# Altium PCB g431.PcbDoc
Units mil, origin at the board's own origin, x right, y up, seen from the top; angles counter-clockwise.
Board outline 2340 x 3365 mil, 4 copper layers (Top Layer, GND, PWR, Bottom Layer), stack 62.449 mil thick; 52 components, 61 nets, 258 pads, 62 vias.
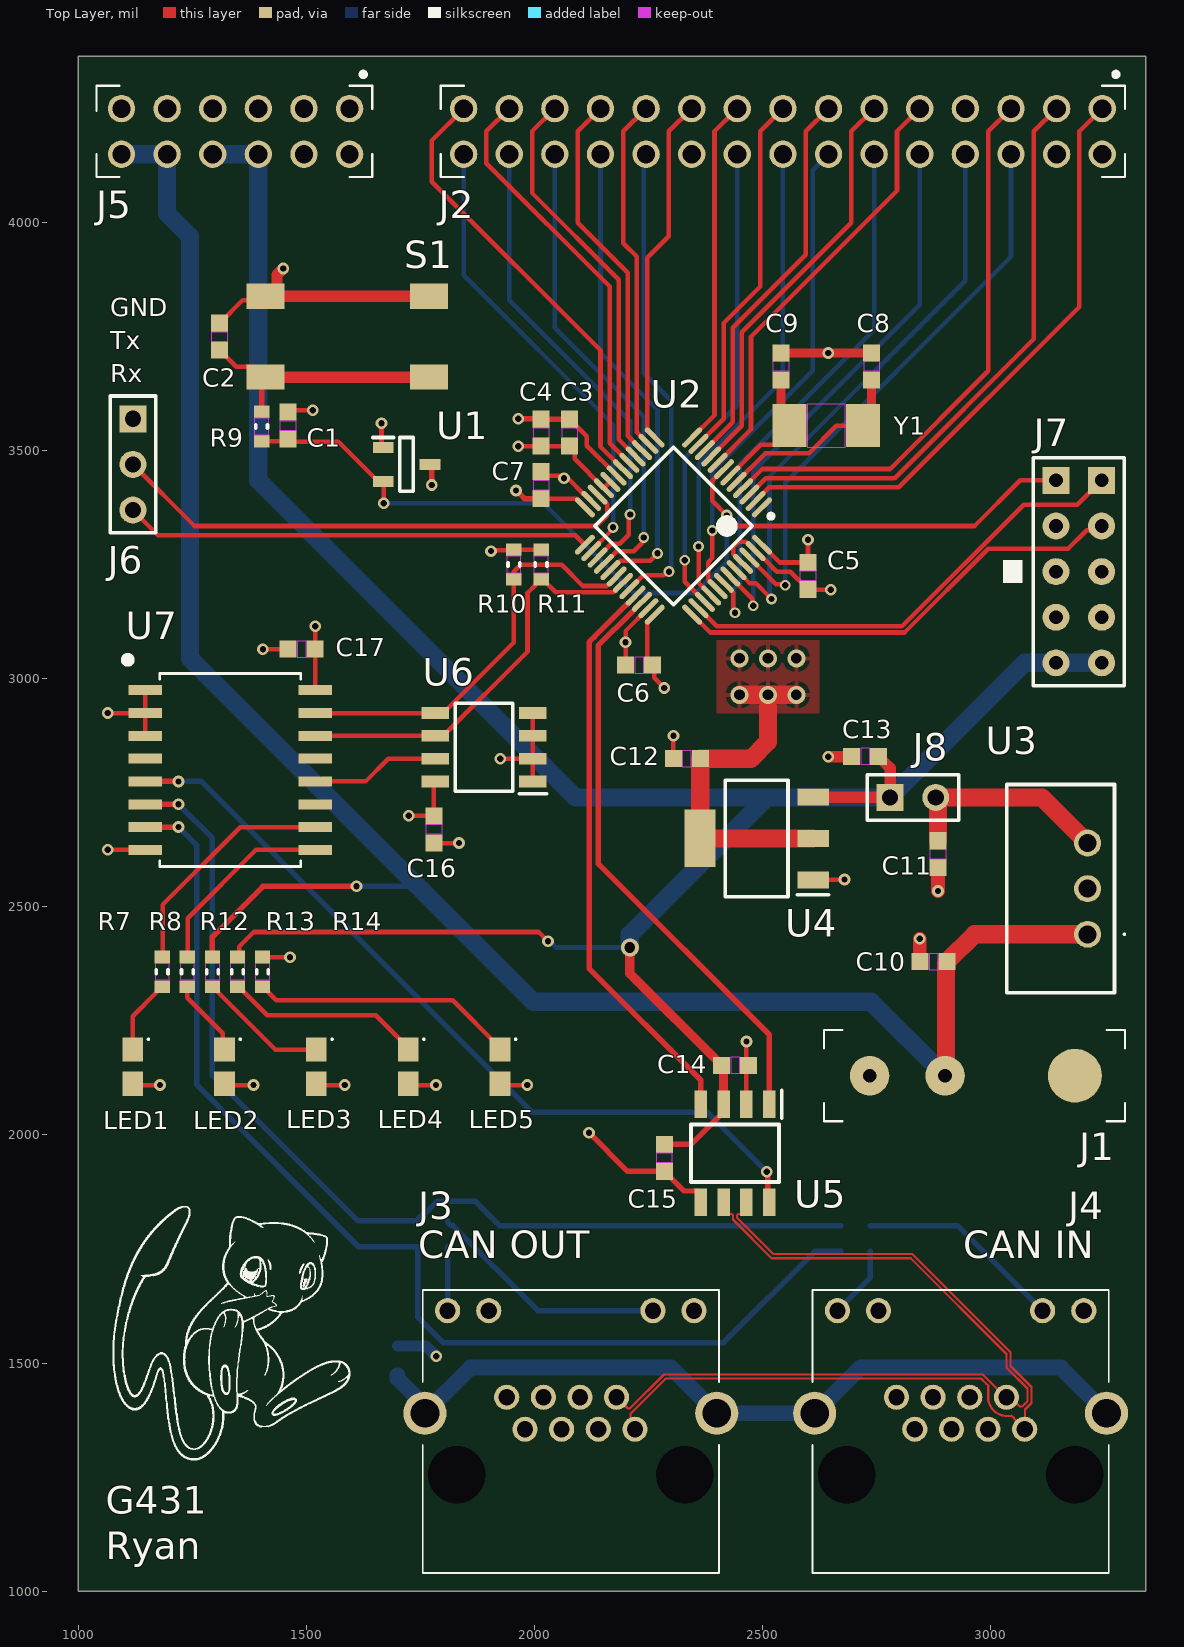
[diagram p0: Top Layer view]
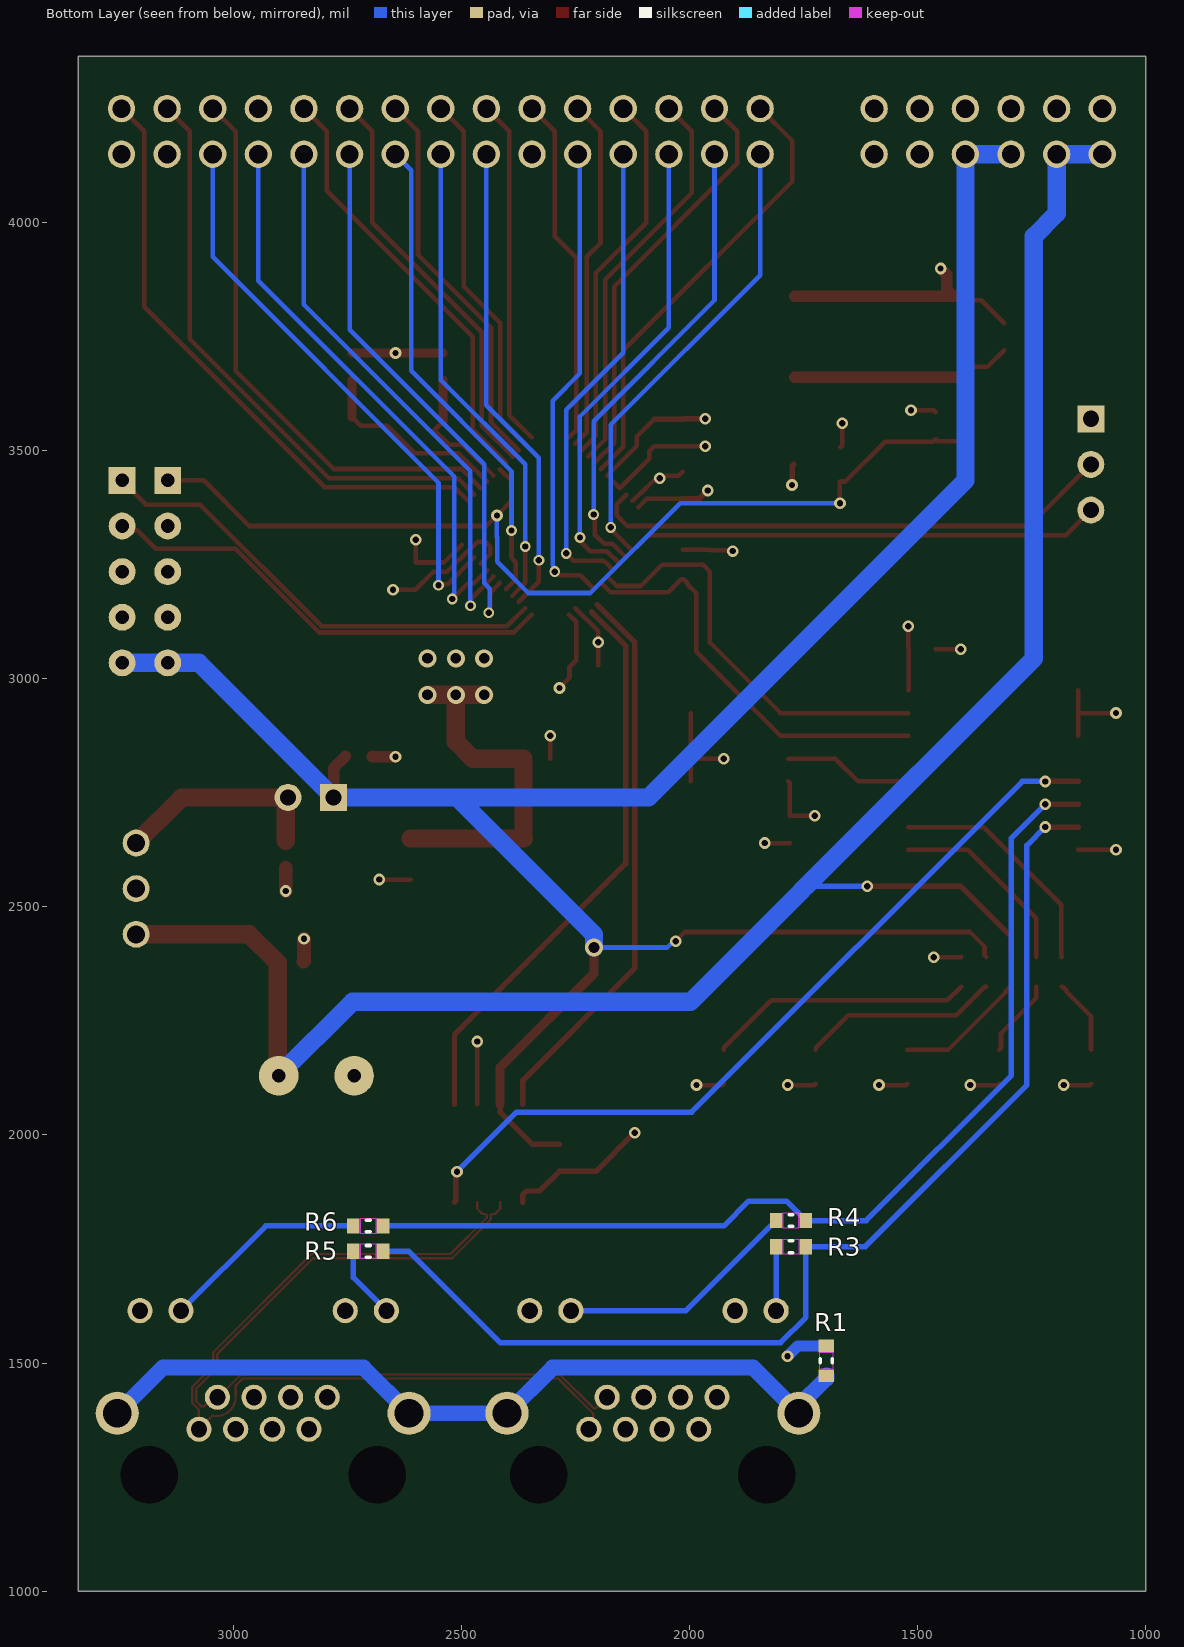
[diagram p1: Bottom Layer view, seen from below]
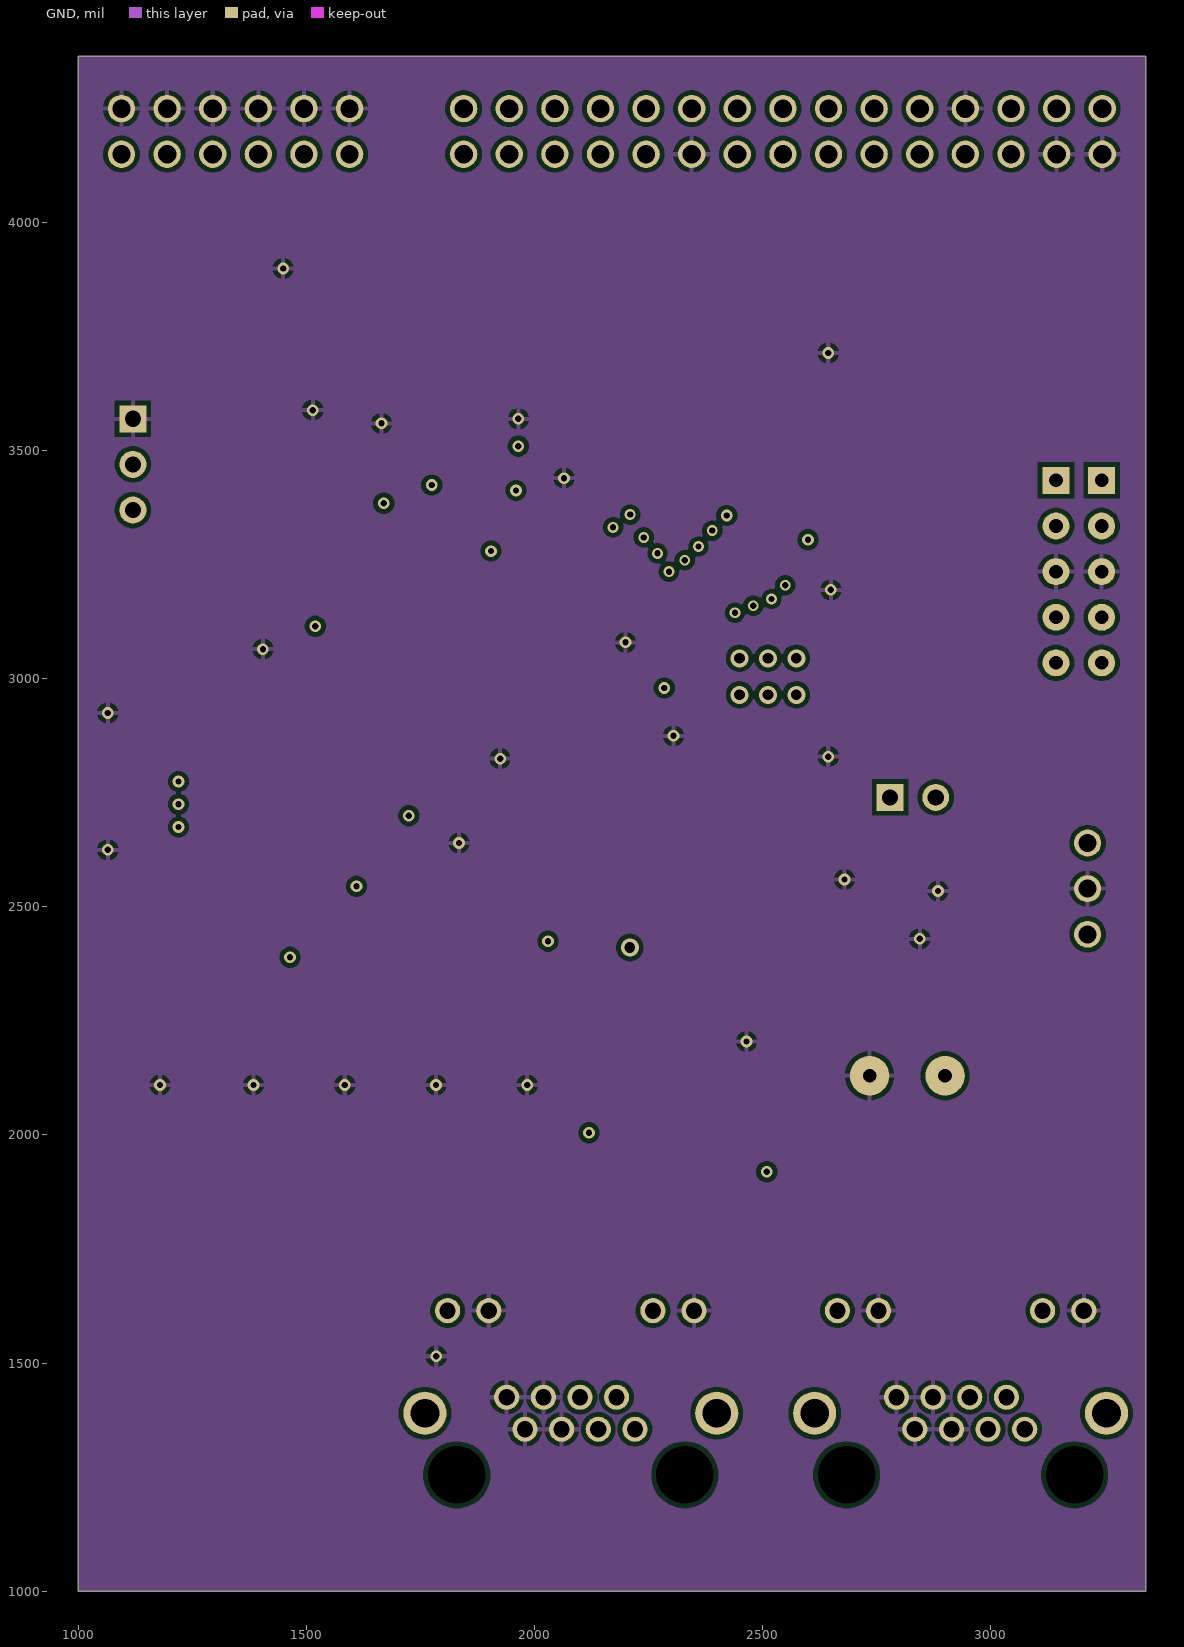
[diagram p2: GND]
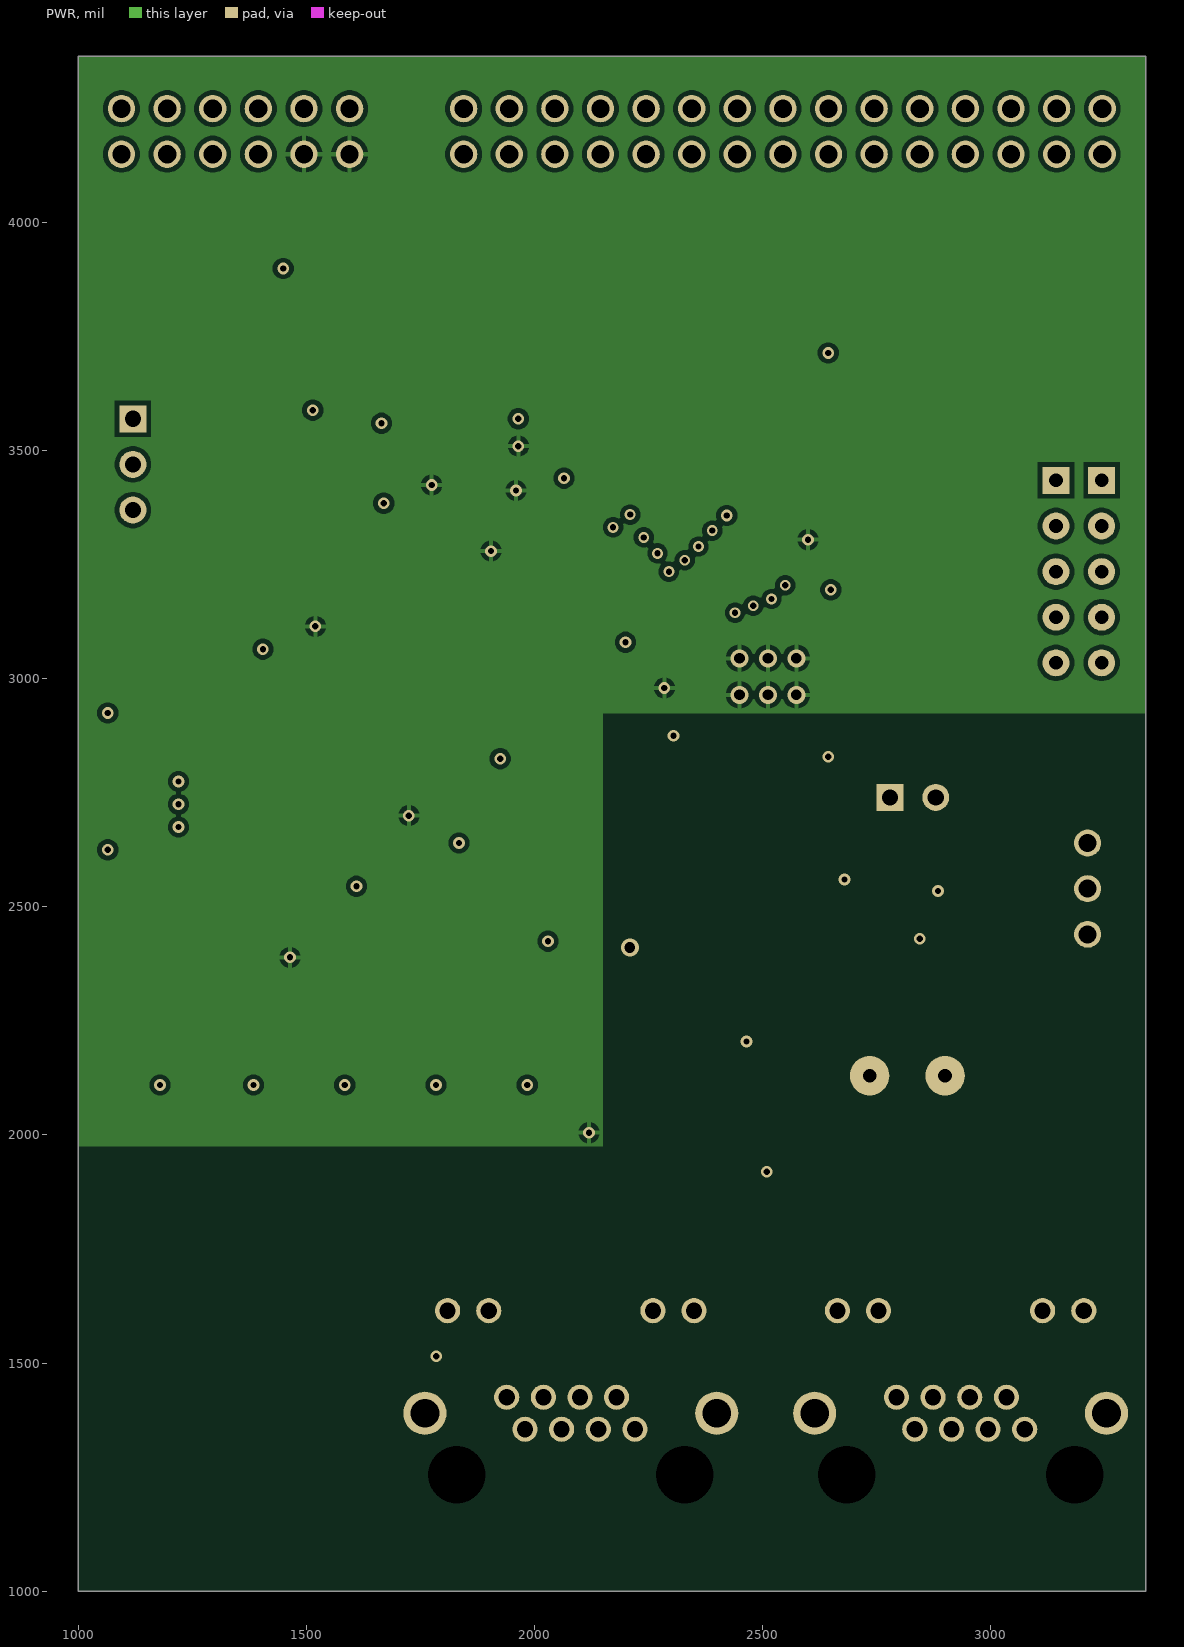
[diagram p3: PWR]
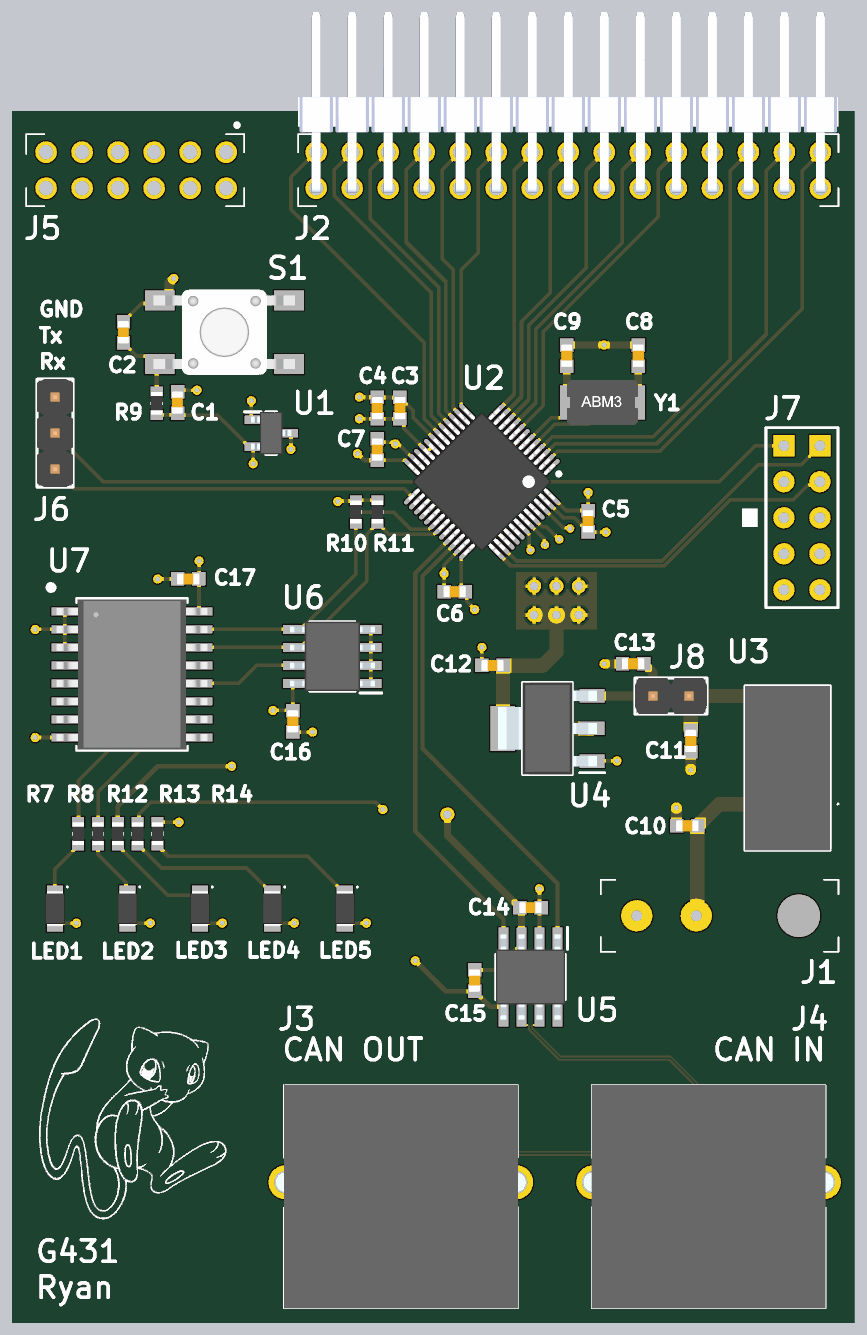
[diagram p4: 3D render of the assembled board from above, using the file's embedded part models]
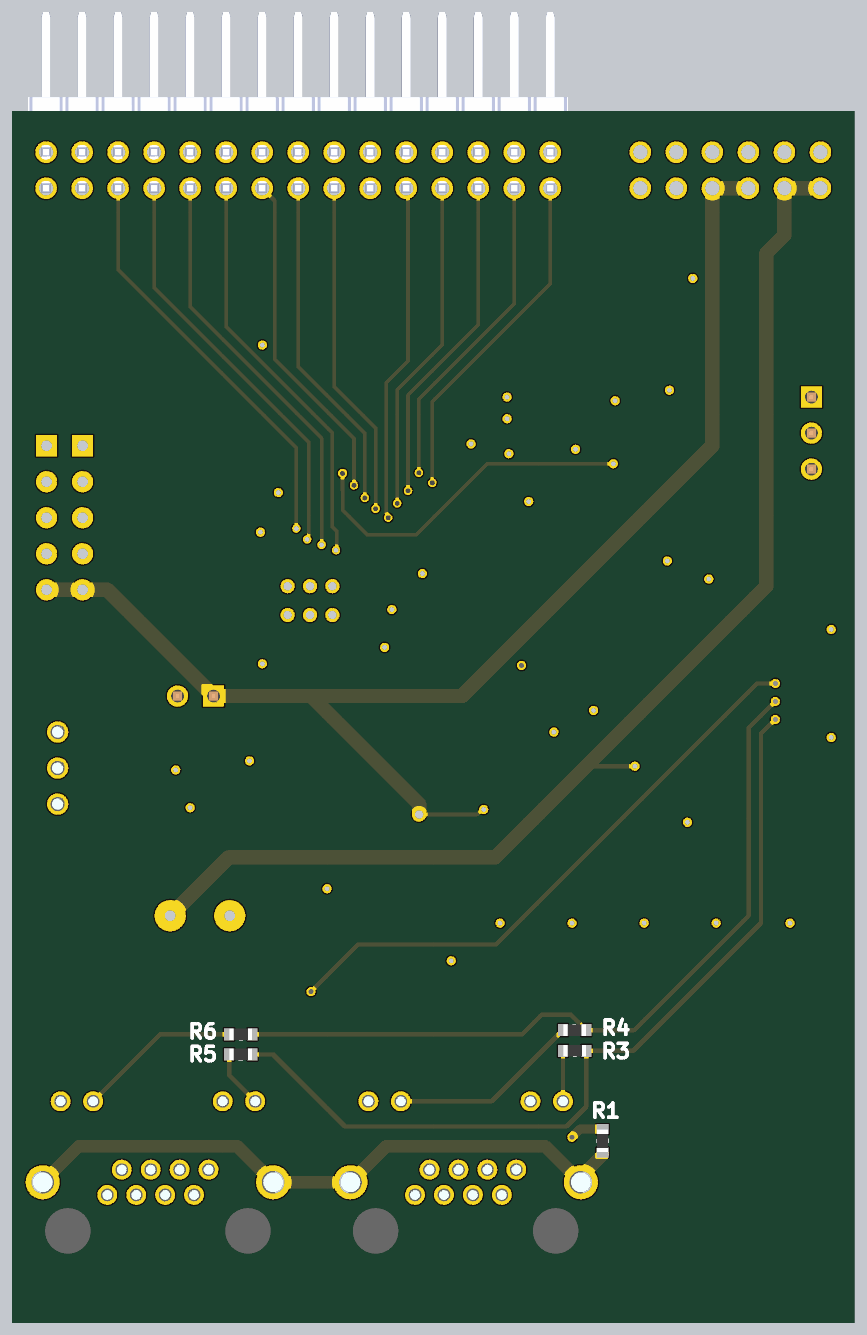
[diagram p5: 3D render of the assembled board from below, using the file's embedded part models]

## Layer stack, top to bottom
Top Solder: solder mask 0.4, Solder Resist, Dk 3.8
Top Layer: signal copper 1.378
Dielectric 2: prepreg 8.284, PP-006, Dk 4.6
GND: signal copper 0.598
Dielectric 1: dielectric 41.929, FR-4, Dk 4.6
PWR: signal copper 0.598
Dielectric 3: prepreg 8.284, PP-006, Dk 4.6
Bottom Layer: signal copper 1.378
Bottom Solder: solder mask 0.4, Solder Resist, Dk 3.8

## Board outline
1000,1000 3340,1000 3340,4365 1000,4365

## Design rules (kind name [scope] priority, off if disabled: settings)
Clearance [All] p1: gap=10 ignorepadtopadclearanceinfootprint=TRUE except(0: Arc-Hole Track-Hole SMDPad-Hole THPad-Hole Via-Hole Fill-Hole Poly-Hole Region-Hole Text-Hole; 3.5: Arc-Arc Arc-Track Track-Track; 5: SMDPad-SMDPad SMDPad-THPad; 7.87: Arc-SMDPad Track-SMDPad SMDPad-Fill SMDPad-Poly SMDPad-Region; 19.68: THPad-THPad)
DiffPairsRouting DiffPairsRouting_CAN [InDifferentialPairClass('CAN')] p1: maxlimit=5 minlimit=4 mostfreqgap=5 toplayer_maxgap=4 toplayer_prefgap=4 toplayer_minwidth=5 toplayer_maxwidth=5 toplayer_prefwidth=5 bottomlayer_maxgap=4 bottomlayer_prefgap=4 bottomlayer_minwidth=5 bottomlayer_maxwidth=5 bottomlayer_prefwidth=5 impedanceprofiledriven=TRUE impedanceprofileid={B7318D11-DDFB-4322-9E92-17B5BC57862B} impedanceprofilevalue=100.000000 maxuncoupledlength=500
DiffPairsRouting [All] p2 off: maxlimit=10 minlimit=10 mostfreqgap=10 toplayer_minwidth=3.5 toplayer_maxwidth=15 toplayer_prefwidth=15 midlayer1_minwidth=15 midlayer1_maxwidth=15 midlayer1_prefwidth=15 midlayer2_minwidth=15 midlayer2_maxwidth=15 midlayer2_prefwidth=15 bottomlayer_minwidth=3.5 bottomlayer_maxwidth=15 bottomlayer_prefwidth=15 maxuncoupledlength=500
HoleSize [All] p1: absolutevalues=TRUE maxlimit=99999 minlimit=1 maxpercent=80.000 minpercent=20.000
PolygonConnect [All] p1: connectstyle=Relief reliefconductorwidth=10 reliefentries=4 polygonreliefangle="90 Angle" airgapwidth=10
RoutingVias [All] p1: holewidth=19.68 width=39.37 viastyle="Through Hole" minholewidth=7.87 minwidth=23.62 maxholewidth=28 maxwidth=50
SilkToSolderMaskClearance [IsPad] p1: minsilkscreentomaskgap=5.91 clearancetoexposedcopper=TRUE
SolderMaskExpansion [All] p1: expansion=4 istentingtop=FALSE
Width [All] p1 off: maxlimit=100 minlimit=3.5 preferedwidth=10
27 further rules are at their usual default settings.

## Classes and differential pairs
differential pair class CAN: CAN
component class U_power: C10 C11 C12 C13 J8 LED3 LED4 LED5 R12 R13 R14 U3 U4
component class U_mcu: C1 C2 C3 C4 C5 C6 C7 C8 C9 J6 J7 R9 R10 R11 S1 U1 U2 Y1
component class U_gpio_expander: C17 U7
component class U_eeprom: C16 U6
component class U_can: C14 C15 U5
component class main: J1 J2 J3 J4 J5 LED1 LED2 R1 R3 R4 R5 R6 R7 R8
differential pair CAN: +CAN_P -CAN_N

## Components (designator, comment, footprint, x,y, rotation, side; value= is the part's Value field where it differs from the comment)
C1 "Capacitor - Nonpolarized" "0603 - Capacitor" 1460,3555 r270 top value=DNP
C2 "Capacitor - Nonpolarized" "0603 - Capacitor" 1310,3750 r270 top value=100nF
C3 "Capacitor - Nonpolarized" "0603 - Capacitor" 2077.5,3539.53 r270 top value=10nF
C4 "Capacitor - Nonpolarized" "0603 - Capacitor" 2015,3539.53 r270 top value=1uF
C5 "Capacitor - Nonpolarized" "0603 - Capacitor" 2600,3225.47 r90 top value=100nF
C6 "Capacitor - Nonpolarized" "0603 - Capacitor" 2229.53,3030 r0 top value=100nF
C7 "Capacitor - Nonpolarized" "0603 - Capacitor" 2015,3424.53 r270 top value=100nF
C8 "Capacitor - Nonpolarized" "0603 - Capacitor" 2739.41,3685 r270 top value=32pF
C9 "Capacitor - Nonpolarized" "0603 - Capacitor" 2540.59,3685 r270 top value=32pF
C10 "Capacitor - Nonpolarized" "0603 - Capacitor" 2875.47,2380 r0 top value=10uF
C11 "Capacitor - Nonpolarized" "0603 - Capacitor" 2885,2615.47 r90 top value=22uF
C12 "Capacitor - Nonpolarized" "0603 - Capacitor" 2334.53,2825 r0 top value=10uF
C13 "Capacitor - Nonpolarized" "0603 - Capacitor" 2725,2830 r0 top value=100nF
C14 "Capacitor - Nonpolarized" "0603 - Capacitor" 2440,2152.72 r180 top value=100nF
C15 "Capacitor - Nonpolarized" "0603 - Capacitor" 2285,1950 r270 top value=100nF
C16 "Capacitor - Nonpolarized" "0603 - Capacitor" 1780,2670 r270 top value=100nF
C17 "Capacitor - Nonpolarized" "0603 - Capacitor" 1490,3065 r0 top value=100nF
J1 "MOLEX0039301021" MOLEX0039301021 2900.35,2130 r90 top
J2 "PH2RA-30-UA" PH2RA-30-UA 3245,4250 r0 top
J3 "MTJ-88ARX1-FSM-LV" MTJ-88ARX1-FSM-LV#1 2090.55,1345 r0 top
J4 "MTJ-88ARX1-FSM-LV" MTJ-88ARX1-FSM-LV#2 2945,1345 r0 top
J5 "PH2RA-12-UA" PH2RA-12-UA 1595,4250 r0 top
J6 "1x3 Header" HDR1X3 1120,3570 r270 top
J7 "2x5 Header" HDR2x5 3143.56,3435 r270 top
J8 "1x2 Header" HDR1X2 2780,2740 r0 top
LED1 "GREEN" "0805 - DIODE" 1120,2150 r270 top
LED2 "RED" "0805 - DIODE" 1321.25,2150 r270 top
LED3 "YELLOW" "0805 - DIODE" 1522.5,2150 r270 top
LED4 "YELLOW" "0805 - DIODE" 1723.75,2150 r270 top
LED5 "YELLOW" "0805 - DIODE" 1925,2150 r270 top
R1 "Resistor" "0603 - Resistor" 1700,1505 r270 bottom value=DNP
R3 "Resistor" "0603 - Resistor" 1777.28,1755 r180 bottom value=150
R4 "Resistor" "0603 - Resistor" 1777.52,1812.5 r180 bottom value=150
R5 "Resistor" "0603 - Resistor" 2704.25,1745 r180 bottom value=150
R6 "Resistor" "0603 - Resistor" 2704.25,1800.75 r180 bottom value=150
R7 "Resistor" "0603 - Resistor" 1184.25,2357.72 r90 top value=150
R8 "Resistor" "0603 - Resistor" 1239.25,2357.72 r90 top value=150
R9 "Resistor" "0603 - Resistor" 1402.28,3553.03 r270 top value=1k
R10 "Resistor" "0603 - Resistor" 1955,3250.75 r90 top value=1k
R11 "Resistor" "0603 - Resistor" 2015,3250.75 r90 top value=1k
R12 "Resistor" "0603 - Resistor" 1294.25,2357.72 r90 top value=1k
R13 "Resistor" "0603 - Resistor" 1349.25,2357.72 r90 top value=350
R14 "Resistor" "0603 - Resistor" 1404.25,2357.72 r90 top value=150
S1 "Switch - Push Button" "6x6mm Switch" 1590,3750 r180 top
U1 "AP1704DWG-7" SOT95P285X140-3N 1720,3470 r0 top
U2 "STM32G431C6T6" TSQFP50P900X900X160-48N 2305,3335 r225 top locked
U3 "LC78_05-0.5" LC78_05-0.5 3212.85,2440 r90 top
U4 "TLV1117-33IDCYR" TLV1117 2487.15,2650 r180 top
U5 "TJA1051T_3,118" "TJA1051T/3,118 - duplicate" 2440,1960 r270 top
U6 "" SOIC127P600X175-8N 1890,2850 r180 top
U7 "TCA9534DWR" TCA9534DWR 1333.61,2800 r0 top
Y1 "Oscillator" "2-SMD NO LEAD CRSYSTAL" 2640,3555 r0 top value=16MHz

## Footprints (in the part's own frame and the unit in brackets; to place one, negate y for a bottom-side part, rotate by r counter-clockwise, add the part's x,y. Pads: shape width x height; smd on the part's side, far side on the other; paste and mask are expansions set on the pad)
"2-SMD NO LEAD CRSYSTAL" [mm]
  rect 1.9x2.4 smd: 1(-2.05,0) 2(2.05,0)
  Top Layer keep-out region: -1.05,1.2 -1.05,-1.2 1.05,-1.2 1.05,1.2
  body extent -2.5,-1.6 2.5,1.6, height 1.3
"6x6mm Switch" [mm]
  rect 2.1x1.4 smd: 1(-4.55,2.25) 1(4.55,2.25) 2(-4.55,-2.25) 2(4.55,-2.25)
  body extent -5,-3 5,3, height 5.12
"0603 - Capacitor" [mm] "0603 Chip Capacitor - IPC Medium Density"
  rect 0.95x0.95 smd: 1(-0.75,0) 2(0.75,0)
  Top Layer keep-out region: -0.25,0.45 -0.25,-0.45 0.25,-0.45 0.25,0.45
  body extent -0.8,-0.4 0.8,0.4, height 0.8
"0603 - Resistor" [mm] "0603 Chip Resistor - IPC Medium Density"
  rect 0.7x0.85 smd: 1(-0.825,0) 2(0.825,0)
  Top Layer keep-out region: -0.45,0.4 -0.45,-0.4 0.45,-0.4 0.45,0.4
  silkscreen extent -0.1,-0.33 0.1,0.33, body extent -0.8,-0.4 0.8,0.4, height 0.45
"0805 - DIODE" [mm] "Diode"
  rect 1.35x1.15 smd: 1(-0.948,-0.009) 2(0.952,-0.009)
  silkscreen extent -1.57,0.82 -1.47,0.92, body extent -1.29,-0.71 1.3,0.69, height 1.2
HDR1X2 [mm] "Connector; Header; 2 Position"
  rect 1.5x1.5 hole 0.9: 1(0,0)
  round 1.5 hole 0.9: 2(2.54,0)
  silkscreen extent -1.27,-1.27 3.81,1.27, body extent -1.27,-1.27 3.81,1.27, height 8.54
HDR1X3 [mm] "Connector; Header; 3 Position"
  rect 1.5x1.5 hole 0.9: 1(0,0)
  round 1.5 hole 0.9: 2(2.54,0) 3(5.08,0)
  silkscreen extent -1.27,-1.27 6.35,1.27, body extent -1.27,-1.27 6.35,1.27, height 8.54
HDR2x5 [mm]
  rect 1.5x1.5 hole 0.762: 1(0,0) 10(0,2.54)
  round 1.5 hole 0.762: 2(2.54,0) 3(5.08,0) 4(7.62,0) 5(10.16,0) 6(10.16,2.54) 7(7.62,2.54) 8(5.08,2.54) 9(2.54,2.54)
  silkscreen extent -1.27,-1.27 11.43,3.81
LC78_05-0.5 [mm]
  round 1.5 hole 1: 1(0,0) 2(2.54,0) 3(5.08,0)
  silkscreen extent -3.26,-2.1 8.34,4.5, body extent -3.26,-1.5 8.34,4.5, height 10.3
MOLEX0039301021 [mm] "2 connector header through hole right angle molex"
  round 2.2 hole 0.762: 1(0,4.2) 2(0,0)
  round 3 smd: M1(0,-7.23)
  silkscreen extent -2.54,-10.02 2.54,6.74
MTJ-88ARX1-FSM-LV#1 [mm] "RJ45 Connector"
  round 1.4 hole 0.9 mask+0.102: 1(3.302,0.254)
  round 1.4 hole 0.9: 2(2.282,2.034) 3(1.262,0.254) 4(0.242,2.034) 5(-0.778,0.254) 6(-1.798,2.034) 7(-2.818,0.254) 8(-3.838,2.034) 9(6.592,6.854) 10(4.302,6.854) 11(-4.838,6.854) 12(-7.128,6.854)
  round 2.4 hole 1.6: MH1(7.857,1.144) MH2(-8.393,1.144)
  round 1.6 hole 3.2 unplated: MH3(6.082,-2.286) MH4(-6.618,-2.286)
  silkscreen extent -8.52,-7.75 7.98,8, body extent -9.09,-7.75 8.56,8, height 13.3
MTJ-88ARX1-FSM-LV#2 [mm] "RJ45 Connector"
  round 1.4 hole 0.9 paste-10 mask+0.102: 1(3.302,0.254)
  round 1.4 hole 0.9: 2(2.282,2.034) 3(1.262,0.254) 4(0.242,2.034) 5(-0.778,0.254) 6(-1.798,2.034) 7(-2.818,0.254) 8(-3.838,2.034) 9(6.592,6.854) 10(4.302,6.854) 11(-4.838,6.854) 12(-7.128,6.854)
  round 2.4 hole 1.6: MH1(7.857,1.144) MH2(-8.393,1.144)
  round 1.6 hole 3.2 unplated: MH3(6.082,-2.286) MH4(-6.618,-2.286)
  silkscreen extent -8.52,-7.75 7.98,8, body extent -9.09,-7.75 8.56,8, height 13.3
PH2RA-12-UA [mil] "CONN HEADER R/A 12POS 2.54MM"
  round 60 hole 40.16: 1(0,0) 2(-100,0) 3(-200,0) 4(-300,0) 5(-400,0) 6(-500,0) 7(0,-100) 8(-100,-100) 9(-200,-100) 10(-300,-100) 11(-400,-100) 12(-500,-100)
  silkscreen extent -555,-150 50,80
PH2RA-30-UA [mil] "CONN HEADER R/A 30POS 2.54MM"
  round 60 hole 40.16: 1(0,0) 2(-100,0) 3(-200,0) 4(-300,0) 5(-400,0) 6(-500,0) 7(-600,0) 8(-700,0) 9(-800,0) 10(-900,0) 11(-1000,0) 12(-1100,0) 13(-1200,0) 14(-1300,0) 15(-1400,0) 16(0,-100) 17(-100,-100) 18(-200,-100) 19(-300,-100) 20(-400,-100) 21(-500,-100) 22(-600,-100) 23(-700,-100) 24(-800,-100) 25(-900,-100) 26(-1000,-100) 27(-1100,-100) 28(-1200,-100) 29(-1300,-100) 30(-1400,-100)
  silkscreen extent -1450,-150 50,80, body extent -1450,-113 50,390, height 197
SOIC127P600X175-8N [mm]
  rect 1.525x0.65 smd: 1(-2.712,1.905) 3(-2.712,-0.635) 4(-2.712,-1.905) 5(2.712,-1.905) 6(2.712,-0.635) 7(2.712,0.635) 8(2.712,1.905)
  rect 1.525x0.65 smd mask+0.102: 2(-2.712,0.635)
  silkscreen extent -3.47,-2.45 1.6,2.58, body extent -3,-2.45 3,2.45, height 1.75
SOT95P285X140-3N [mm]
  rect 1.15x0.6 smd: 1(-1.3,0.95) 2(-1.3,-0.95) 3(1.3,0)
  silkscreen extent -1.88,-1.5 0.38,1.5, body extent -1.42,-1.5 1.43,1.5, height 1.4
TCA9534DWR [mil]
  rect 73.78x21.97 smd paste+0 mask+4.02: 1(-186.39,175) 2(-186.39,125) 3(-186.39,75) 4(-186.39,25) 5(-186.39,-25) 6(-186.39,-75) 7(-186.39,-125) 8(-186.39,-175) 9(186.39,-175) 10(186.39,-125) 11(186.39,-75) 12(186.39,-25) 13(186.39,25) 14(186.39,75) 15(186.39,125) 16(186.39,175)
  silkscreen extent -230,-212 154,247, body extent -209,-206 209,206, height 104
"TJA1051T/3,118 - duplicate" [mm] "SOIC127P600X175-8N"
  rect 1.55x0.7 smd: 1(-2.725,1.905) 2(-2.725,0.635) 3(-2.725,-0.635) 4(-2.725,-1.905) 5(2.725,-1.905) 6(2.725,-0.635) 7(2.725,0.635) 8(2.725,1.905)
  silkscreen extent -3.5,-2.45 1.6,2.61, body extent -3,-2.45 3,2.45, height 1.75
TLV1117 [mm] "SOT230P700X180-4N"
  rect 1.75x0.95 smd: 1(-3.15,2.3) 2(-3.15,0) 3(-3.15,-2.3)
  rect 1.75x3.2 smd: 2(3.15,0)
  silkscreen extent -4.03,-3.25 1.75,3.25, body extent -3.5,-3.25 3.5,3.25, height 1.8
TSQFP50P900X900X160-48N [mm] "TSQFP, 48-Leads, Body 7.00x7.00mm, Pitch 0.50mm, IPC Medium Density"
  oval 1.45x0.3 smd: 1(-4.225,2.75) 2(-4.225,2.25) 3(-4.225,1.75) 4(-4.225,1.25) 5(-4.225,0.75) 6(-4.225,0.25) 7(-4.225,-0.25) 8(-4.225,-0.75) 9(-4.225,-1.25) 10(-4.225,-1.75) 11(-4.225,-2.25) 12(-4.225,-2.75) 25(4.225,-2.75) 26(4.225,-2.25) 27(4.225,-1.75) 28(4.225,-1.25) 29(4.225,-0.75) 30(4.225,-0.25) 31(4.225,0.25) 32(4.225,0.75) 33(4.225,1.25) 34(4.225,1.75) 35(4.225,2.25) 36(4.225,2.75)
  oval 0.3x1.45 smd: 13(-2.75,-4.225) 14(-2.25,-4.225) 15(-1.75,-4.225) 16(-1.25,-4.225) 17(-0.75,-4.225) 18(-0.25,-4.225) 19(0.25,-4.225) 20(0.75,-4.225) 21(1.25,-4.225) 22(1.75,-4.225) 23(2.25,-4.225) 24(2.75,-4.225) 37(2.75,4.225) 38(2.25,4.225) 39(1.75,4.225) 40(1.25,4.225) 41(0.75,4.225) 42(0.25,4.225) 43(-0.25,4.225) 44(-0.75,4.225) 45(-1.25,4.225) 46(-1.75,4.225) 47(-2.25,4.225) 48(-2.75,4.225)
  silkscreen extent -4.35,-3.1 3.1,3.57, body extent -4.5,-4.5 4.5,4.5, height 1.6

## Part data
C1 C2 C3 C4 C5 C6 C7 C8 C9 C13 C14 C15 C16 C17: "Nonpolarized Capacitor"
C10: "Nonpolarized Capacitor", Volt Rating=50V
C11 C12: "Nonpolarized Capacitor", Volt Rating=10V
J1: "Connector Header Through Hole, Right Angle 2 pin 0.165\" (4.20mm)"
J2: "Connector Header Through Hole, Right Angle 30 position 0.100\" (2.54mm)", Manufacturer="Adam Tech", Supplier Part Number=2057-PH2RA-30-UA-ND, ComponentLink1Description=Datasheet, ComponentLink1URL=https://app.adam-tech.com/products/download/data_sheet/200508/ph2ra-xx-ua-data-sheet.pdf, Manufacturer Part Number=PH2RA-30-UA, Supplier=DigiKey
J3 J4: "RJ45 Connector"
J5: "Connector Header Through Hole, Right Angle 12 position 0.100\" (2.54mm)", Manufacturer="Adam Tech", Manufacturer Part Number=PH2RA-30-UA, Supplier Part Number=2057-PH2RA-30-UA-ND, ComponentLink1Description=Datasheet, ComponentLink1URL=https://app.adam-tech.com/products/download/data_sheet/200508/ph2ra-xx-ua-data-sheet.pdf, Supplier=DigiKey
J6: "1x3 Pin Header"
J7: "2x5 Pin Header"
J8: "1x2 Pin Header"
LED1 LED2 LED3 LED4 LED5: library part LED, "Light Emitting Diode"
S1: "Push Button Switch"
U1: "Power Supply Support Circuit, Fixed, 1 Channel, PDSO3", Manufacturer="Diodes Inc.", Max Operating Temperature=70°C, Min Operating Temperature=0°C, Package Body Material=Plastic, Package Code=LSSOP, Package Shape=Rectangular, Package Style="SMALL OUTLINE, LOW PROFILE, SHRINK PITCHMeter", Peak Reflow Temperature (Cel)=260°C, Supplier Part Number=AP1704DWGDITR-ND, Supply Voltage-Max (Vsup)=5.5V, Supply Voltage-Min (Vsup)=1V, Temperature Grade=COMMERCIAL, Time @ Peak Reflow Temperature-Max (s)=40s, Adjustable Threshold=No, Analog IC - Other Type="POWER SUPPLY SUPPORT CIRCUIT", Category="Voltage Supervisors", ComponentLink6Description=Datasheet, ComponentLink6URL=https://media.digikey.com/pdf/Data%20Sheets/Diodes%20PDFs/AP1701-1704.pdf, Height - Seated (Max)=1.4mm, JESD-30 Code=R-PDSO-G3, JESD-609 Code=e3, Length=3mm, Manufacturer Part Number=AP1704DWG-7, Moisture Sensitivity Level=3, Number of Channels=1, Number of Functions=1, Number of Pins=3, Qualification Status="Not Qualified", REACH SVHC=Yes, RoHS=Yes, RoHS Compliant=Yes, Supplier=Diji-Key, Surface Mount=Yes, Terminal Finish=Tin, Terminal Form="Gull Wing", Terminal Pitch=0.95mm, Terminal Position=DUAL, Width=1.6mm
U2: "MCU 32BIT 32KB FLASH 48LQFP", Manufacturer=ST, Supplier Part Number=STM32G431C6T6-ND, Manufacturer Part Number=STM32G431C6T6, Supplier=Digikey
U3: "Non-Isolated PoL Module DC DC Converter 1 Output 5V 500mA 6.8V - 28V Input", Manufacturer="GAPTEC Electronic. KG", Supplier Part Number 1=3182-LC78_05-0.5-ND, Manufacturer Part Number=LC78_05-0.5, RoHS=No, Supplier 1=Digi-Key
U4: "Linear Voltage Regulator IC 3.3V 800MA SOT223-4", Manufacturer="Texas Instruments", Supplier Part Number=296-21112-1-ND, ComponentLink1Description=Datasheet, ComponentLink1URL=http://www.ti.com/lit/ds/symlink/tlv1117.pdf?HQS=TI-null-null-digikeymode-df-pf-null-wwe&ts=1590668900314, Manufacturer Part Number=TLV1117-33IDCYR, Supplier=Digikey
U5: "CAN Transceiver IC 4.5V-5.5V 250ns", Manufacturer=NXP, Manufacturer Part Number=TJA1051T/3,118, Supplier Part Number=568-8684-1-ND, ComponentLink1Description=Datasheet, ComponentLink1URL=http://www.nxp.com/docs/en/data-sheet/TJA1051.pdf, Supplier=Digikey
U6: library part M24128-BWMN6TP, "EEPROM Memory IC 128Kb (16K x 8) I²C 1 MHz 450 ns 8-SOIC", Manufacturer_Name=STMicroelectronics, Supplier Part Number=497-8621-2-ND, ComponentLink1Description=Datasheet, ComponentLink1URL=https://www.st.com/content/ccc/resource/technical/document/datasheet/59/05/c9/5b/7b/41/48/b6/CD00259167.pdf/files/CD00259167.pdf/jcr:content/translations/en.CD00259167.pdf, Datasheet Link=http://www.st.com/st-web-ui/static/active/en/resource/technical/document/datasheet/CD00259167.pdf, Height=1.75mm, Manufacturer_Part_Number=M24128-BWMN6TP, Supplier=Digi-Key
U7: "Low Voltage 8-Bit I2C and SMBUS Low-Power I/O Expander with Interrupt / Output and Configuration Registers", Mfr_Name="Texas Instruments", Copyright="Copyright (C) 2022 Ultra Librarian. All rights reserved.", Digi-Key_Part_Number_1=296-47827-1-ND, Digi-Key_Part_Number_2=296-47827-2-ND, Digi-Key_Part_Number_3=296-47827-6-ND, Manufacturer_Part_Number=TCA9534DWR, RefDes=RefDes, Type=DEV
Y1: "Crystal Oscillator"

## Via types
v1: diameter 25.59, hole 13.78, Top Layer to Bottom Layer, 43 vias
v2: diameter 23.62, hole 13.78, Top Layer to Bottom Layer, 12 vias
v3: diameter 39.37, hole 23.62, Top Layer to Bottom Layer, 7 vias

## Nets (pads, with @x,y where several pads share a name; then routed paths per layer and width w, separated by ;. In a path a pad name is that pad's centre, name@x,y a point inside that pad or via, vN(x,y) a via of type N, cw(c..) or ccw(c..) an arc to the next point about the centre after c; other vN are vias at no path point)
3.3V: C3.2 C4.2 C5.2 C6.2 C7.2 C12.2 C15.2 C16.1 C17.2 J5.7 J5.8 R10.2 R11.2 R14.2 U1.3 U2.20 U2.21 U2.24 U2.36 U2.48 U4.2 U5.5 U6.8 U7.16 | length 2394.5
  Top Layer w10: R14.2 1404.62,2389.82 1464.02,2389.82 v1(1464.4,2389.45) ; U7.16 1519.53,2975.47 C17.2 1520,3065.47 v1(1520,3115) ; v1(1725,2700) 1779.53,2700 C16.1 1780,2771.77 U6.8 ; v1(1905,3280) 1906.61,3281.61 1953.39,3281.61 R10.2 R11.2 ; v1(1965,3510) C4.2 C3.2 2088.25,3499.25 2088.25,3482.16 U2.21 U2.20 ; C7.2 2093.17,3395 U2.24@2111.58,3376.58 ; U2.36 2247.93,3124.82 2247.93,3041.12 C6.2 2262.84,3026.21 2262.84,3002.16 v1(2285,2980) ; U2.48 2538.11,3255 C5.2 v1(2600,3305)
  Top Layer w12: U1.3 1775,3466.18 v1(1775,3425) ; v1(1960,3412.8) 1960.5,3412.8 1978.3,3395 C7.2 ; v1(2120,2005) 2204.53,1920.47 C15.2 2328.24,1877.23 2357.22,1877.23 2365,1869.45 U5.5
  Top Layer w40: v3(2450,2965) v3(2512.14,2965) ; v3(2574.29,2965) v3(2512.14,2965) ; U4.2@2611.16,2650 2363.13,2650 2363.59,2650.46 2363.59,2824.54 2474.54,2824.54 2512.14,2862.14 v3(2512.14,2965)
  other v3: 2450,3045 2512.14,3045 2574.29,3045
5V: C13.2 C14.2 C15.1 J5.9 J5.10 J7.5 J7.6 J8.1 R13.2 U4.3 U5.3 | length 5309.9
  Top Layer w10: R13.2 1353.12,2394.06 1353.12,2413.12 1385,2445 2010,2445 v1(2030,2425)
  Top Layer w12: C15.1 2343.98,1979.53 2415,2050.55 U5.3 ; C14.2 C14.2@2415,2148.19
  Top Layer w20: v3(2209.26,2411.01) 2209.26,2353.93 C14.2 ; U5.3 C14.2@2415,2148.19
  Top Layer w25: U4.3 2611.44,2740.28 2779.72,2740.28 J8.1 2780,2804.53 C13.2
  Bottom Layer w10: v1(2030,2425) 2034.22,2425 2048.21,2411.01 v3(2209.26,2411.01)
  Bottom Layer w40: J5.10 J5.9 1395,3435 2090,2740 2510,2740 ; v3(2209.26,2411.01) 2209.26,2439.26 2510,2740 ; J7.6 J7.5 3075,3035 J8.1 2510,2740
5V_DCDC: C11.2 J8.2 U3.3 | length 471.3
  Top Layer w40: C11.2 2885,2735 J8.2 3112.85,2740 U3.3
12V: C10.2 J1.2 J5.11 J5.12 R12.2 U3.1 | length 4385.4
  Top Layer w12: R12.2 1294.32,2390.27 1294.32,2434.38 1404.95,2545 v1(1610,2545)
  Top Layer w40: J1.2 2902.68,2132.32 2902.68,2377.68 C10.2 2965,2440 U3.1
  Bottom Layer w12: v1(1610,2545) 1745,2545 1752.5,2537.5
  Bottom Layer w40: J5.12 J5.11 1195,4020 1245,3970 1245,3045 1745,2545 ; 1752.5,2537.5 1998.03,2291.97 2738.39,2291.97 J1.2
CAN_G_LED: R3.2 R5.2 U7.7 | length 2473.7
  Top Layer w12: U7.7 v1(1220,2675)
  Bottom Layer w12: v1(1220,2675) 1260,2635 1260,2110 1615,1755 R3.2 1744.8,1600.2 1800,1545 2415,1545 2615,1745 R5.2
CAN_N: J3.2 J4.2 U5.6 | length 1868.8
  Top Layer w5: J3.2 2205.27,1400.2 2209.41,1400.2 2284.2,1475 2983.17,1475 2985.8,1472.36 J4.2@3033.09,1425.08 ; U5.6 2415,1838.13 2426.28,1826.85 2432.57,1826.85 2435.5,1823.93 2435.5,1814.59 2520.09,1730 2825,1730 3035,1520 3035,1490 3081,1444 3081,1416.29 3069.47,1404.76 3064.1,1404.76 3043.78,1425.08 J4.2 J4.2@3035,1425.24
CAN_P: J3.1 J4.1 U5.7 | length 1960.3
  Top Layer w5: J3.1 2210.96,1364.59 2210.96,1389.03 2287.93,1466 2979.44,1466 2990.73,1454.71 2994.83,1450.61 2994.83,1426.94 ccw(c3034.83,1424.88) 3006.51,1396.55 ccw(c3037.17,1427.21) 3046.15,1384.79 3050.68,1380.26 3052.28,1378.66 3052.28,1377.72 J4.1@3062.5,1367.5 ; U5.7 2465,1838.13 2453.72,1826.85 2447.43,1826.85 2444.5,1823.93 2444.5,1818.32 2523.82,1739 2828.73,1739 3044,1523.73 3044,1493.73 3090,1447.73 3090,1412.56 3075.84,1398.39 3075.84,1375.09 3068.25,1367.5 J4.1@3062.5,1367.5 ; J4.1 J4.1@3062.5,1367.5
CAN_STANDBY: U5.8 U7.5 | length 1785.6
  Top Layer w12: U7.5 v1(1220,2775) ; v1(2509.4,1919.45) 2512,1916.85 2512,1855.72 U5.8
  Bottom Layer w12: v1(1220,2775) 1270,2775 1995,2050 2378.85,2050 v1(2509.4,1919.45)
CAN_Y_LED: R4.2 R6.2 U7.6 | length 2248.9
  Top Layer w12: U7.6 v1(1220,2725)
  Bottom Layer w12: v1(1220,2725) 1294.32,2650.68 1294.32,2130.68 1612.5,1812.5 R4.2 1745.04,1815.45 1752.82,1823.23 1755.77,1823.23 1787.54,1855 1870,1855 1924.25,1800.75 R6.2
FDCAN1_RX: U2.33 U5.4 | length 1231
  Top Layer w12: U2.33@2202.37,3162.63 2131.03,3091.3 2120,3080.27 2120,2365 2365,2120 U5.4
FDCAN1_TX: U2.34 U5.1 | length 1265.6
  Top Layer w12: 2214.23,3146.8 2140,3072.56 2140,2595 2515,2220 U5.1
G_LED: R7.2 U7.10 | length 520.5
  Top Layer w10: R7.2 1185,2390.94 1185,2505 1355,2675 U7.10
GND: C1.1 C2.1 C3.1 C4.1 C5.1 C6.1 C7.1 C8.1 C9.1 C10.1 C11.1 C12.1 C13.1 C14.1 C16.2 C17.1 J1.1 J2.4 J2.16 J2.17 J2.25 J3.5 J3.6 J3.7 J3.8 J3.9 J3.11 J4.5 J4.6 J4.7 J4.8 J4.9 J4.11 J5.1 J5.2 J5.3 J5.4 J5.5 J5.6 J6.1 J7.3 J7.8 LED1.2 LED2.2 LED3.2 LED4.2 LED5.2 R1.1 S1.2 U1.1 U2.19 U2.23 U2.35 U2.45 U2.47 U3.2 U4.1 U5.2 U6.1 U6.2 U6.3 U6.4 U7.1 U7.2 U7.3 U7.8 | length 3158.8
  Top Layer w10: v1(1065,2625) U7.8 ; v1(1065,2925) U7.2 ; LED1.2 1122.71,2109.45 v1(1179.4,2109.45) ; U7.3 U7.2 ; U7.1 U7.2 ; C2.1 1360.39,3829.91 1402.2,3829.91 S1.2@1410.87,3838.58 ; LED2.2 1323.96,2109.45 v1(1384.4,2109.45) ; v1(1405,3065) C17.1 ; C1.1 1464.45,3588.98 v1(1514.4,3588.98) ; LED3.2 1525.21,2109.45 v1(1584.4,2109.45) ; v1(1665,3560) 1665,3511.22 U1.1 ; LED4.2 1726.46,2109.45 v1(1784.4,2109.45) ; S1.2@1769.13,3838.58 S1.2@1770,3839.45 ; C16.2 1780.47,2640 v1(1835,2640) ; LED5.2 1927.71,2109.45 v1(1984.4,2109.45) ; v1(1925,2825) U6.2 ; U6.1 U6.2 ; U6.4 U6.3 U6.2 ; C7.1 2024.06,3445 2055.78,3445 2063.76,3437.02 2076.43,3437.02 2106.55,3406.89 2107.34,3406.89 2124.25,3389.98 U2.23 ; C3.1 2115,3531.56 2115,3511.08 U2.19 ; C6.1 2200,3104.73 U2.35 ; C12.1 v1(2305,2875) ; U2.45 2457.42,3252.67 2436.55,3273.54 2436.55,3289.88 2447.55,3300.89 2463.9,3300.89 2484.77,3280.02 2485.75,3280.02 2502.66,3263.11 2503.45,3263.11 2531.56,3235 2560.94,3235 2600.94,3195 v1(2650,3195) ; U5.2 v1(2465,2205) ; U4.1 2611.71,2560 v1(2680,2560)
  Top Layer w12: v1(1965,3570) 2014.06,3570 C4.1 C3.1
  Top Layer w20: C9.1 2540.67,3714.45 v1(2644.4,3714.45) 2739.33,3714.45 C8.1
  Top Layer w25: v1(1449.4,3899.45) 1449.4,3899.29 1435.87,3885.77 1435.87,3853.64 1420.81,3838.58 1410.87,3838.58 S1.2@1769.13,3838.58 ; v1(2644.4,2829.45) 2644.51,2829.56 2695.04,2829.56 C13.1
  Top Layer w30: v1(2845,2430) 2845,2380.94 C10.1 ; v1(2885,2535) C11.1
  Bottom Layer w25: R1.1 1762.52,1537.48 v1(1785,1515)
  other v1: 2200,3080 2065,3440
I2C2_SCL: R11.1 U2.31 U6.6 U7.14 | length 914.2
  Top Layer w10: U7.14 U6.6 1800.45,2875 1985,3059.55 1985,3188.27 2003.27,3206.54 2003.27,3209.49 2012.05,3218.27 R11.1 2017.95,3218.27 2046.67,3189.55 2172.98,3189.55 2193.85,3210.42 U2.31
I2C2_SDA: R10.1 U2.30 U6.5 U7.15 | length 914
  Top Layer w10: U7.15 U6.5 1800.45,2925 1955,3079.55 R10.1 1955,3235 1970,3250 2060,3250 2106.53,3203.47 2159.06,3203.47 2179.93,3224.34 U2.30
NetC2_2: C2.2 R9.1 S1.1 | length 563.1
  Top Layer w10: C2.2 1346.5,3683.98 1388.31,3683.98 S1.1@1410.87,3661.42
  Top Layer w12: R9.1 1402.28,3652.83 S1.1@1410.87,3661.42
  Top Layer w25: S1.1@1410.87,3661.42 S1.1@1769.13,3661.42
NetJ3_10: J3.10 R4.1 | length 533.5
  Bottom Layer w12: R4.1 1810,1809.55 1817.78,1801.77 1820.73,1801.77 2007.66,1614.84 J3.10
NetJ3_12: J3.12 R3.1 | length 140.2
  Bottom Layer w12: R3.1 1809.84,1754.92 1809.84,1614.92 J3.12
NetJ4_10: J4.10 R6.1 | length 454.6
  Bottom Layer w12: R6.1 2928.46,1800.75 J4.10
NetJ4_12: J4.12 R5.1 | length 160.1
  Bottom Layer w12: J4.12 2736.73,1687.2 R5.1
NetLED1_1: LED1.1 R7.1 | length 166.4
  Top Layer w10: LED1.1 1119.65,2260.63 1172.52,2313.5 1172.52,2316.46 1181.3,2325.24 R7.1
NetLED2_1: LED2.1 R8.1 | length 171.7
  Top Layer w10: R8.1 1239.25,2300.75 1316.97,2223.03 1316.97,2191.24 LED2.1
NetLED3_1: LED3.1 R12.1 | length 286.8
  Top Layer w10: R12.1 1297.2,2325.24 1305.98,2316.46 1305.98,2313.5 1432.17,2187.31 LED3.1
NetLED4_1: LED4.1 R13.1 | length 433.6
  Top Layer w10: R13.1 1352.2,2325.24 1414.77,2262.67 1651.98,2262.67 1723.4,2191.25 LED4.1
NetLED5_1: LED5.1 R14.1 | length 579.8
  Top Layer w10: R14.1 1434.49,2295 1820.9,2295 1924.65,2191.25 LED5.1
OSC_IN: C8.2 U2.5 Y1.2 | length 436.5
  Top Layer w10: U2.5 2506.64,3494.88 2602.03,3494.88 2662.14,3555 Y1.2 Y1.2@2739.41,3573.7
  Top Layer w20: Y1.2@2739.41,3573.7 C8.2
OSC_OUT: C9.2 U2.6 Y1.1 | length 289
  Top Layer w10: U2.6 2496.68,3512.76 2526.89,3512.76 2559.29,3545.16 Y1.1@2540.59,3563.86
  Top Layer w20: Y1.1@2540.59,3563.86 C9.2
PA0: J2.5 U2.8 | length 960.1
  Top Layer w10: U2.8 2475,3546.76 2475,3750 2795,4070 2795,4200 J2.5
PA1: J2.6 U2.9 | length 910.5
  Top Layer w10: U2.9 2455,3554.6 2455,3760 2695,4000 2695,4200 J2.6
PA2: J2.7 U2.10 | length 861
  Top Layer w10: U2.10 2435,3562.44 2435,3770 2595,3930 2595,4200 J2.7
PA3: J2.8 U2.11 | length 811.4
  Top Layer w10: U2.11 2415,3570.27 2415,3780 2495,3860 2495,4200 J2.8
PA4: J2.9 U2.12 | length 761.8
  Top Layer w10: U2.12 2395,3578.11 2395,4200 J2.9
PA5: J2.10 U2.13 | length 767.7
  Top Layer w10: U2.13 2247.93,3545.18 2247.93,3922.93 2295,3970 2295,4200 J2.10
PA6: J2.11 U2.14 | length 778.2
  Top Layer w10: J2.11 2195,4200 2195,3955 2225,3925 2225,3540.76 2250.02,3515.75 U2.14
PA7: J2.12 U2.15 | length 827.8
  Top Layer w10: J2.12 2095,4200 2095,4000 2204.87,3890.13 2204.87,3532.56 U2.15
PA10: J2.26 U2.32 | length 1046.7
  Top Layer w10: U2.32 2239.05,3227.29 2283.61,3227.29 2291.31,3235 v2(2295,3235)
  Bottom Layer w10: J2.26 2240,4145 2240,3670 2300,3610 2300,3247.67 2297.61,3245.28 2297.61,3237.61 v2(2295,3235)
PA15: J2.24 U2.39 | length 1047.2
  Top Layer w10: v2(2330,3260) 2330,3212.56 U2.39
  Bottom Layer w10: v2(2330,3260) 2330,3485 2445,3600 J2.24
PB0: J2.13 U2.16 | length 877.4
  Top Layer w10: J2.13 1995,4200 1995,4065 2185,3875 2185,3524.6 U2.16
PB1: J2.14 U2.17 | length 927
  Top Layer w10: J2.14 1895,4200 1895,4130 2165,3860 2165,3516.76 U2.17
PB2: J2.15 U2.18 | length 993.1
  Top Layer w10: J2.15 1775,4180 1775,4090 2145,3720 2145,3508.92 U2.18
PB3: J2.23 U2.40 | length 1055.6
  Top Layer w10: v2(2360,3290) 2360,3210.4 U2.40
  Bottom Layer w10: v2(2360,3290) 2360,3470 2545,3655 J2.23
PB4: J2.22 U2.41 | length 1071.5
  Top Layer w10: v2(2390,3325) 2390,3265 2380.87,3255.87 2380.87,3217.86 2401.74,3196.99 U2.41
  Bottom Layer w10: v2(2390,3325) 2390,3455 2610,3675 2610,4115 J2.22
PB5: J2.21 U2.42 | length 1209
  Top Layer w10: U2.42 2415.66,3209.93 2436.53,3189.06 2436.53,3152.16 2440,3148.69 v2(2440,3145)
  Bottom Layer w10: v2(2440,3145) 2437.39,3147.61 2437.39,3197.39 2450,3210 2450,3470 2745,3765 J2.21
PB6: J2.20 U2.43 | length 1226.4
  Top Layer w10: U2.43 2478,3175.92 2478,3162 v2(2480,3160)
  Bottom Layer w10: v2(2480,3160) 2480,3455 2845,3820 J2.20
PB7: J2.19 U2.44 | length 1257.4
  Top Layer w10: U2.44 2471.76,3210 2485,3210 v2(2520,3175)
  Bottom Layer w10: v2(2520,3175) 2517.39,3177.61 2517.39,3185.87 2515.59,3187.67 2515.59,3443.43 2945,3872.84 J2.19
PB9: J2.18 U2.46 | length 1254
  Top Layer w10: U2.46 2529.83,3207.61 2547.39,3207.61 v2(2550,3205)
  Bottom Layer w10: v2(2550,3205) 2550,3430 3045,3925 J2.18
PB12: J2.30 U2.26 | length 1025.5
  Top Layer w10: U2.26 2124.74,3280.51 2172.6,3328.36 v2(2172.6,3331.98)
  Bottom Layer w10: J2.30 1845,3885 2172.6,3557.4 v2(2172.6,3331.98)
PB13: J2.29 U2.27 | length 1034.2
  Top Layer w10: U2.27 2139.15,3266.1 2168.76,3295.7 2187.02,3295.7 2207.39,3316.08 2207.39,3357.39 v2(2210,3360)
  Bottom Layer w10: J2.29 1945,3830 2210,3565 v2(2210,3360)
PB14: J2.28 U2.28 | length 1036.6
  Top Layer w10: U2.28 2153.07,3252.18 2180.89,3280 2217.67,3280 2237.39,3299.72 2237.39,3307.39 v2(2240,3310)
  Bottom Layer w10: J2.28 2045,3770 2240,3575 v2(2240,3310)
PB15: J2.27 U2.29 | length 1045.5
  Top Layer w10: U2.29 2166.99,3238.26 2183.9,3255.17 2184.7,3255.17 2188.65,3259.13 2254.13,3259.13 v2(2270,3275)
  Bottom Layer w10: J2.27 2145,3715 2270,3590 v2(2270,3275)
PC13: J2.1 U2.2 | length 1341
  Top Layer w10: U2.2 2515.28,3420 2799.14,3420 3195,3815.86 3195,4200 J2.1
PC14: J2.2 U2.3 | length 1290.7
  Top Layer w10: U2.3 2507.44,3440 2790,3440 3095,3745 3095,4200 J2.2
PC15: J2.3 U2.4 | length 1239.8
  Top Layer w10: U2.4 2499.6,3460 2780,3460 2995,3675 2995,4200 J2.3
R\E\S\E\T\: C1.2 J7.1 R9.2 U1.2 U2.7 | length 2216.1
  Top Layer w10: R9.2 1455.08,3520.55 C1.2 1465.47,3520 1570.59,3520 1657.99,3432.6 U1.2 1670,3431.42 v1(1670,3385) ; U2.7 2390,3433.92 2390,3390 v1(2421.92,3358.08) 2445,3335 2965,3335 3065,3435 J7.1
  Bottom Layer w10: v1(1670,3385) 2020.25,3385 2217.06,3188.19 2353.06,3188.19 2421.5,3256.63 2421.5,3310.5 2421.92,3310.92 v1(2421.92,3358.08)
R_LED: R8.2 U7.9 | length 427.2
  Top Layer w10: R8.2 1240,2390.94 1240,2475 1390,2625 U7.9
SHIELD: J3.MH1 J3.MH2 J4.MH1 J4.MH2 R1.2 | length 1767.2
  Bottom Layer w35: R1.2 1700,1466.25 1760.12,1406.14 J3.MH2 1860.08,1490 2299.92,1490 J3.MH1 J4.MH2 2714.53,1490 3154.37,1490 J4.MH1
SWCLK: J7.10 U2.38 | length 1032.6
  Top Layer w10: U2.38 2360.47,3154.74 2400.22,3115 2805.91,3115 3072.87,3381.96 3190.52,3381.96 J7.10
SWDIO: J7.9 U2.37 | length 1010.5
  Top Layer w10: U2.37 2385.39,3101.5 2811.5,3101.5 2995,3285 3170,3285 3210.61,3325.61 3234.18,3325.61 J7.9
UART3_RX: J6.3 U2.25 | length 1022.3
  Top Layer w10: J6.3 1175,3315 1210,3315 2089.76,3315 U2.25
UART3_TX: J6.2 U2.22 | length 1158.9
  Top Layer w10: J6.2 1255,3335 2136.31,3335 2159.53,3358.22 2159.53,3382.54 U2.22@2138.66,3403.41
WRITE_CTRL: U6.7 U7.12 | length 283.9
  Top Layer w10: U7.12 1630,2775 1680,2825 U6.7
pads on no net: J1.M1 J3.3 J3.4 J3.MH3 J3.MH4 J4.3 J4.4 J4.MH3 J4.MH4 J7.2 J7.4 J7.7 U2.1 U7.4 U7.11 U7.13

## Polygon pours and split planes (outlines as drawn)
3.3V on Top Layer "3.3V_L01_P008" (solid, pour order 8): 2400,2925 2400,3085 2625,3085 2625,2925
3.3V on PWR "3.3V_L03_P002" (solid, pour order 2): 1000,4365 1000,1975 2150,1975 2150,2925 3340,2925 3340,4365
GND on GND "GND_L02_P000" (solid, pour order 0): 1000.67,998.5 1000,999.17 1000,4365 3340,4365 3339.9,4364.9 3339.9,998.5

## Silkscreen, mask and mechanical layers (free items; w line width, h text height)
Top Overlay:
  drawing of 9 lines, arcs and shapes, not listed
  text "GND" at 1070,3795 h40
  text "Tx" at 1070,3722.5 h40
  text "Rx" at 1070,3650 h40
  text "CAN OUT" at 1745,1730 h60
  text "CAN IN" at 2940,1730 h60
  text "G431" at 1060.69,1170 h60
  text "Ryan" at 1060.69,1069.99 h60